# Altium PCB PCB1.PcbDoc
Units mil, origin at the board's own origin, x right, y up, seen from the top; angles counter-clockwise.
Board outline 3725 x 3985 mil, 2 copper layers (Top Layer, Bottom Layer); 36 components, 36 nets, 194 pads, 3 vias.
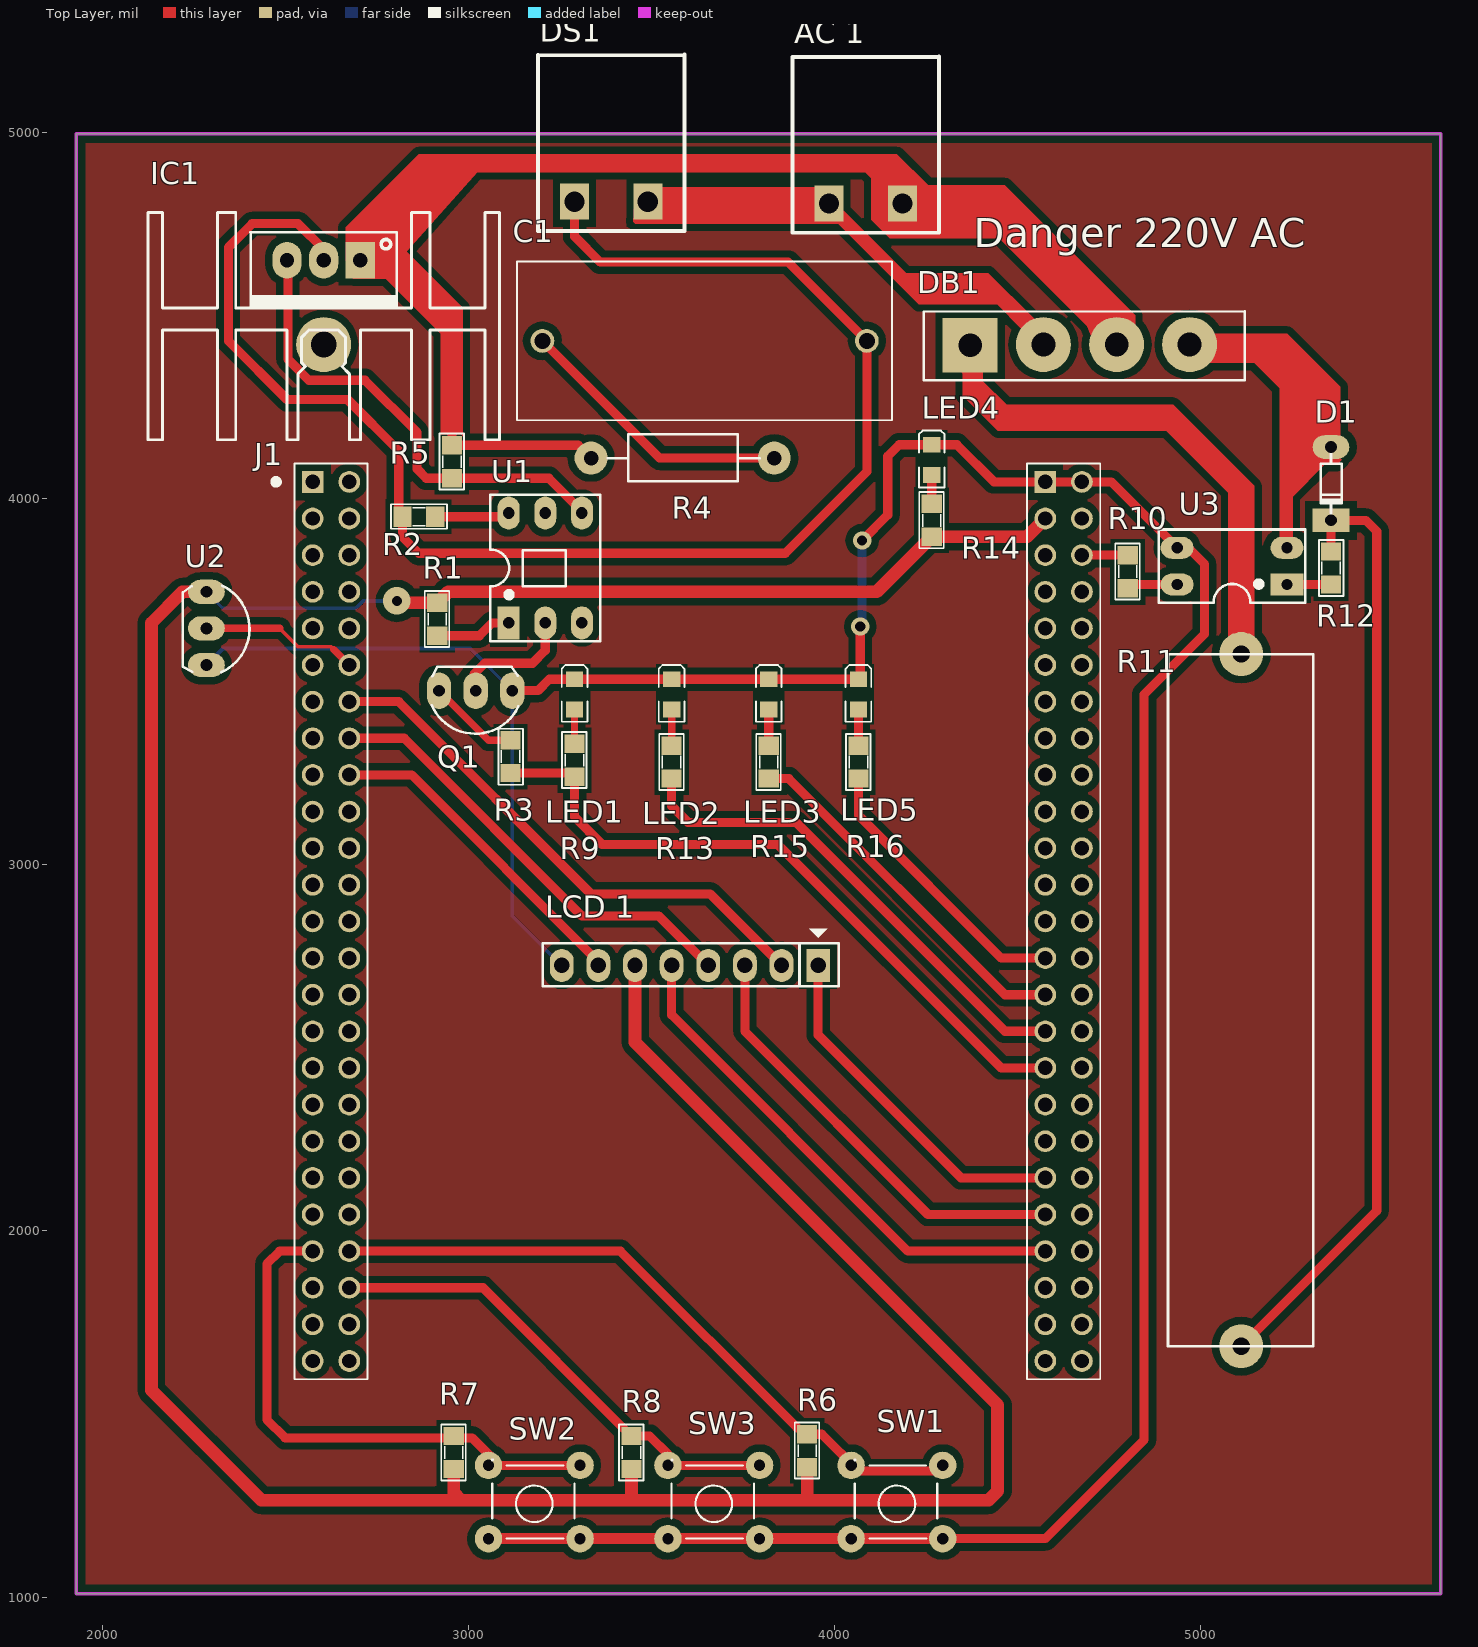
[diagram p0: Top Layer view]
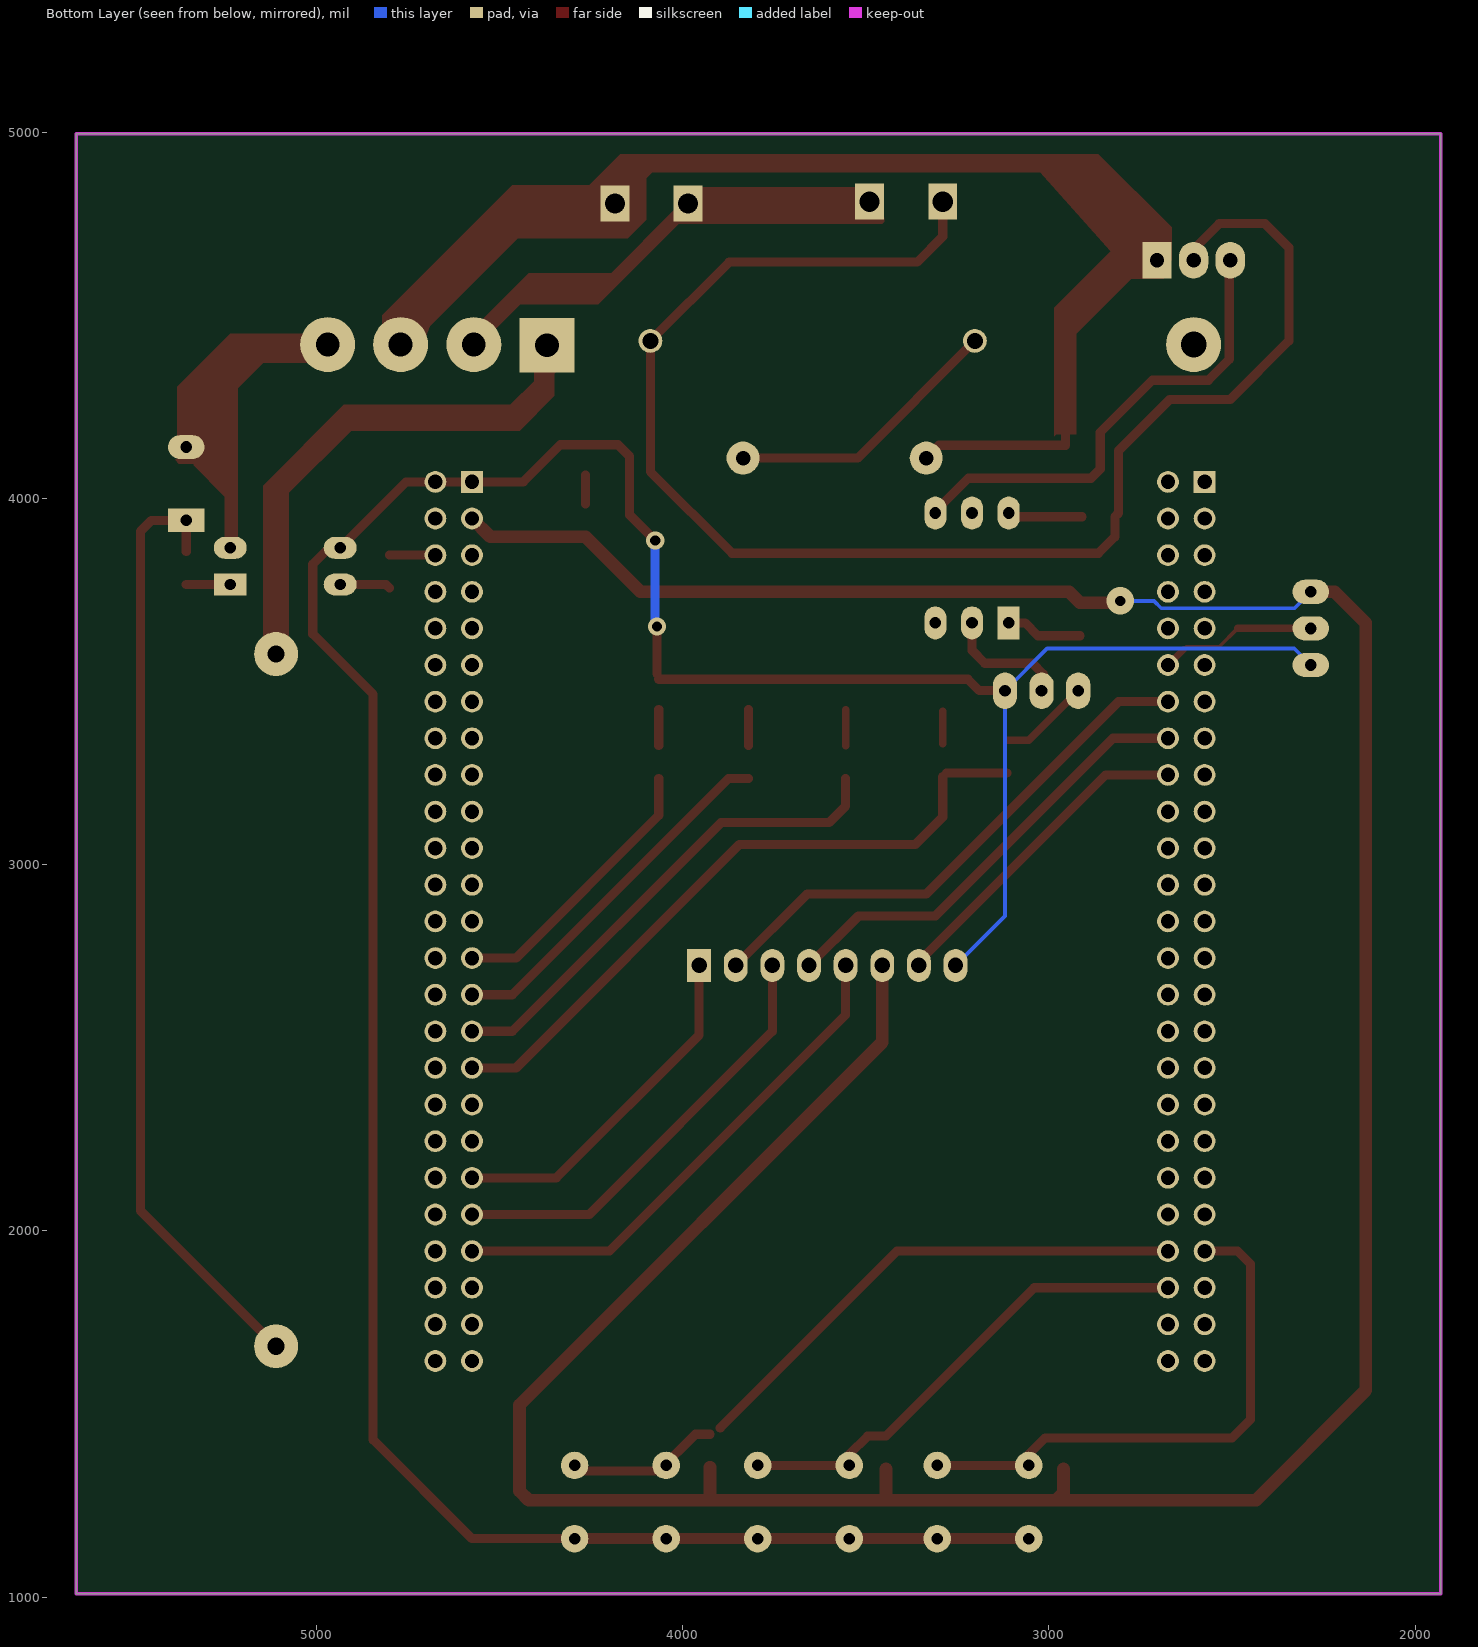
[diagram p1: Bottom Layer view, seen from below]

## Layer stack, top to bottom
Top Solder: solder mask 0.4, Solder Resist, Dk 3.5
Top Layer: signal copper 1.4
Dielectric 1: dielectric 12.6, FR-4, Dk 4.8
Bottom Layer: signal copper 1.4
Bottom Solder: solder mask 0.4, Solder Resist, Dk 3.5

## Board outline
1930,1010 1930,4995 5655,4995 5655,1010

## Design rules (kind name [scope] priority, off if disabled: settings)
Clearance [All] p1: gap=20 ignorepadtopadclearanceinfootprint=FALSE except(0: Arc-Hole Track-Hole SMDPad-Hole THPad-Hole Via-Hole Fill-Hole Poly-Hole Region-Hole Text-Hole; 10: Arc-Arc Arc-Track Arc-SMDPad Arc-THPad Arc-Via Track-Track Track-SMDPad Track-THPad Track-Via SMDPad-SMDPad SMDPad-THPad SMDPad-Via THPad-THPad THPad-Via Via-Via; 15: Arc-Text Track-Text SMDPad-Text THPad-Text Via-Text Fill-Text Poly-Text Region-Text Text-Text)
ComponentClearance [All] p1 off: gap=10 collisioncheckmode=3 verticalgap=10 showdistances=FALSE
Height [All] p1 off: minheight=0 maxheight=1000 prefheight=500
PolygonConnect [All] p1: connectstyle=Relief reliefconductorwidth=10 reliefentries=4 polygonreliefangle="90 Angle" airgapwidth=10
RoutingVias [All] p1: holewidth=28 width=50 viastyle="Through Hole" minholewidth=28 minwidth=50 maxholewidth=28 maxwidth=50
SolderMaskExpansion [All] p1: expansion=4
Width [All] p1: maxlimit=40 minlimit=10 preferedwidth=20 minimp=50.000000 maximp=50.000000 favimp=50.000000
28 further rules are at their usual default settings.

## Components (designator, comment, footprint, x,y, rotation, side; value= is the part's Value field where it differs from the comment)
"AC 1" "Header 2" "DOMINO 2-5mm -H" 3985,4805 r0 top
C1 "" C-SE-22,5x26x20x11x4 3645,4430 r180 top value=0.1uF/630
D1 "5V" DIO-0.5A-SMALL 5355,4040 r90 top
DB1 "Diode Brideg" "DIO-Bri 5A" 4370,4420 r0 top value="Cau 1A"
DS1 "Lamp" "DOMINO 2-5mm -H" 3290,4810 r0 top
IC1 "BT137" TO220H2 2605,4650 r180 top value=LM317
J1 "STM32F4DISCOVERY" STMICROELECTRONICS_STM32F4DISCOVERY_STM32F4DISCOVERY(Primary) 2575,4045 r0 top
"LCD 1" "Header 8" JP8 3955,2725 r180 top
LED1 "LED" LED_0805_Blue 3290,3465 r90 top value="LED 3 ly Single Colour"
LED2 "LED" LED_0805_Blue 3555,3465 r90 top value="LED 3 ly Single Colour"
LED3 "LED" LED_0805_Blue 3820,3465 r90 top value="LED 3 ly Single Colour"
LED4 "LED" LED_0805_Blue 4265,4105 r90 top value="LED 3 ly Single Colour"
LED5 "LED" LED_0805_Blue 4065,3465 r90 top value="LED 3 ly Single Colour"
Q1 "C1815" QTO-92 3020,3475 r180 top
R1 "220R" RES-SM-0805 2915,3715 r270 top value="R1/4W - 1K"
R2 "180R" RES-SM-0805 2910,3950 r180 top value="R1/4W - 1K"
R3 "2.2k" RES-SM-0805 3115,3250 r90 top value="R1/4W - 1K"
R4 "100R/2W" R1W 3335,4110 r0 top value="R1/4W - 1K"
R5 "150R" RES-SM-0805 2955,4145 r270 top value="R1/4W - 1K"
R6 "10K" RES-SM-0805 3925,1445 r270 top value="R1/4W - 1K"
R7 "10K" RES-SM-0805 2960,1440 r270 top value="R1/4W - 1K"
R8 "10K" RES-SM-0805 3445,1440 r270 top value="R1/4W - 1K"
R9 "330R" RES-SM-0805 3290,3330 r270 top value="R1/4W - 1K"
R10 "1K" RES-SM-0805 4800,3845 r270 top
R11 "10K 10W" PCBComponent_1 5110,3575 r270 top
R12 "470R" RES-SM-0805 5355,3765 r90 top
R13 "330R" RES-SM-0805 3555,3325 r270 top value="R1/4W - 1K"
R14 "1K" RES-SM-0805 4265,3985 r270 top value="R1/4W - 1K"
R15 "330R" RES-SM-0805 3820,3325 r270 top value="R1/4W - 1K"
R16 "330R" RES-SM-0805 4065,3325 r270 top value="R1/4W - 1K"
SW1 "SW" SW4 4295,1160 r180 top value="Button chip 4 pin"
SW2 "SW" SW4 3305,1160 r180 top value="Button chip 4 pin"
SW3 "SW" SW4 3795,1160 r180 top value="Button chip 4 pin"
U1 "MOC3021" DIP6/W0.3 3110,3660 r0 top
U2 "LM35" QTO-92 2285,3645 r270 top
U3 "PC817" DIP4 5235,3765 r90 top

## Footprints (in the part's own frame and the unit in brackets; to place one, negate y for a bottom-side part, rotate by r counter-clockwise, add the part's x,y. Pads: shape width x height; smd on the part's side, far side on the other; paste and mask are expansions set on the pad)
C-SE-22,5x26x20x11x4 [mm] "Film Capacitors, 2-Leads, Body 22,5x26x20x11"
  round 1.65 hole 1.1: 1(-11.25,0) 2(11.25,0)
  silkscreen extent -13,-5.5 13,5.5, body extent -13,-5.5 13,5.5, height 20.01
DIO-0.5A-SMALL [mil] "Diode muoi, W 80mil, L 300mil"
  oval 65x100 hole 32: 1(100,0)
  rect 65x100 hole 32: 2(-100,0)
  silkscreen extent -80,-30 80,28, body extent -108,-33 108,32, height 61
"DIO-Bri 5A" [mil] "Brigde 5A"
  rect 150x150 hole 65: 1(0,-2)
  round 150 hole 65: 2(200,0) 3(400,0) 4(599,0)
  silkscreen extent -127,-97 750,90, body extent -129,-90 749,58, height 937
DIP4 [mil]
  rect 60x90 hole 31: 1(0,0)
  oval 60x90 hole 31: 2(100,0) 3(100,300) 4(0,300)
  silkscreen extent -50,-50 150,350, body extent -59,-10 159,305, height 170
DIP6/W0.3 [mil] "6 PIN, W 300mil, Pin to pin 100mil"
  rect 60x90 hole 31.5: 1(0,0)
  oval 60x90 hole 31.5: 2(100,0) 3(200,0) 4(200,300) 5(100,300) 6(0,300)
  silkscreen extent -50,-50 250,350, body extent -58,-7 260,307, height 170
"DOMINO 2-5mm -H" [mm]
  rect 2x2.5 hole 1.4: 1(0,0) 2(5.08,0)
  silkscreen extent -2.54,-2.03 7.62,10.21, body extent -2.5,-1.75 7.58,10.25, height 3.15
JP8 [mil] "JP8"
  rect 65x90 hole 42: 1(0,0)
  oval 65x90 hole 42: 2(100,0) 3(200,0) 4(300,0) 5(400,0) 6(500,0) 7(600,0) 8(700,0)
  silkscreen extent -56,-100 752,57, body extent -48,-50 748,48, height 323
LED_0805_Blue [mm] "Chip LED, 2-Leads, Body 2.0x1.3mm, IPC Medium Density"
  rect 1.1x1.2 smd: 1(-1.05,0) 2(1.05,0)
  silkscreen extent -1.91,-0.89 2.03,0.89, body extent -1,-0.63 1,0.62, height 0.68
PCBComponent_1 [mil] "R5W , 2 pin, 400 x 950mil"
  round 120 hole 47.24: 1(0,0) 2(1889.76,0)
  silkscreen extent 0,-200 1890,197
QTO-92 [mil] "TO-92"
  oval 66x100 hole 32: 1(-100,0) 2(0,0) 3(100,0)
  silkscreen extent -117,-65 120,118, body extent -109,-66 109,95, height 245
R1W [mil] "R 1W, 2 pin, 500mil"
  round 90 hole 39.37: 1(0,0) 2(500,0)
  silkscreen extent 46,-63 460,65
RES-SM-0805 [mil]
  rect 50x55 smd: 1(0,0) 2(90,0)
  silkscreen extent -32,-34 121,33, body extent 6,-25 84,25, height 31
STMICROELECTRONICS_STM32F4DISCOVERY_STM32F4DISCOVERY(Primary) [mm]
  rect 1.508x1.508 hole 1: P1(0,0) P51(50.8,0)
  round 1.508 hole 1: P2(2.54,0) P3(0,-2.54) P4(2.54,-2.54) P5(0,-5.08) P6(2.54,-5.08) P7(0,-7.62) P8(2.54,-7.62) P9(0,-10.16) P10(2.54,-10.16) P11(0,-12.7) P12(2.54,-12.7) P13(0,-15.24) P14(2.54,-15.24) P15(0,-17.78) P16(2.54,-17.78) P17(0,-20.32) P18(2.54,-20.32) P19(0,-22.86) P20(2.54,-22.86) P21(0,-25.4) P22(2.54,-25.4) P23(0,-27.94) P24(2.54,-27.94) P25(0,-30.48) P26(2.54,-30.48) P27(0,-33.02) P28(2.54,-33.02) P29(0,-35.56) P30(2.54,-35.56) P31(0,-38.1) P32(2.54,-38.1) P33(0,-40.64) P34(2.54,-40.64) P35(0,-43.18) P36(2.54,-43.18) P37(0,-45.72) P38(2.54,-45.72) P39(0,-48.26) P40(2.54,-48.26) P41(0,-50.8) P42(2.54,-50.8) P43(0,-53.34) P44(2.54,-53.34) P45(0,-55.88) P46(2.54,-55.88) P47(0,-58.42) P48(2.54,-58.42) P49(0,-60.96) P50(2.54,-60.96) P52(53.34,0) P53(50.8,-2.54) P54(53.34,-2.54) P55(50.8,-5.08) P56(53.34,-5.08) P57(50.8,-7.62) P58(53.34,-7.62) P59(50.8,-10.16) P60(53.34,-10.16) P61(50.8,-12.7) P62(53.34,-12.7) P63(50.8,-15.24) P64(53.34,-15.24) P65(50.8,-17.78) P66(53.34,-17.78) P67(50.8,-20.32) P68(53.34,-20.32) P69(50.8,-22.86) P70(53.34,-22.86) P71(50.8,-25.4) P72(53.34,-25.4) P73(50.8,-27.94) P74(53.34,-27.94) P75(50.8,-30.48) P76(53.34,-30.48) P77(50.8,-33.02) P78(53.34,-33.02) P79(50.8,-35.56) P80(53.34,-35.56) P81(50.8,-38.1) P82(53.34,-38.1) P83(50.8,-40.64) P84(53.34,-40.64) P85(50.8,-43.18) P86(53.34,-43.18) P87(50.8,-45.72) P88(53.34,-45.72) P89(50.8,-48.26) P90(53.34,-48.26) P91(50.8,-50.8) P92(53.34,-50.8) P93(50.8,-53.34) P94(53.34,-53.34) P95(50.8,-55.88) P96(53.34,-55.88) P97(50.8,-58.42) P98(53.34,-58.42) P99(50.8,-60.96) P100(53.34,-60.96)
  silkscreen extent -2.74,-62.23 54.61,1.27
SW4 [mil] "SW button 4pin, 250 x250 mil"
  round 75 hole 31: 1(0,0) 2(250,-200) 3(250,0) 4(0,-200)
  silkscreen extent 15,-215 240,0, body extent -36,-220 276,24, height 276
TO220H2 [mil] "TO-220 - 1-2-3"
  round 150 hole 70: 0(0,230)
  rect 80x100 hole 39: 1(-100,0)
  oval 80x100 hole 39: 2(0,0) 3(100,0)
  silkscreen extent -480,-130 480,490, body extent -449,-177 453,469, height 1206

## Part data
"AC 1": "Header, 2-Pin", Manufacturer="Generic Components", Class=Connector
C1: library part "Cap Pol3", "Polarized Capacitor (Surface Mount)", LatestRevisionDate=17-Jul-2002, LatestRevisionNote="Re-released for DXP Platform.", PackageReference=C0805, Publisher="Altium Limited"
D1: library part "DIODE Zener", "Zenner"
DB1: library part "DIODE BRIGDE", "Convert AC to DC voltage, 4 pin", ="Cau 5A"
DS1: "Incandescent Bulb", LatestRevisionDate=17-Jul-2002, LatestRevisionNote="Re-released for DXP Platform.", PackageReference=PIN2, Published=24-Mar-1999, Publisher="Altium Limited"
IC1: "Triacs - 8A"
J1: "Development kit: ARM ST; pin strips, pin header; No.of", Package=None, Availability=Unavailable, MF=STMicroelectronics, MP=STM32F4DISCOVERY, Price=None, SnapEDA_Link=https://www.snapeda.com/symbols-footprints/STM32F4DISCOVERY/STMicroelectronics/view-part/?ref=snap
"LCD 1": library part HED8V, "Header 8 Vit Broad"
LED1 LED2 LED3 LED4 LED5: "LED Single colour Green and Red"
Q1: "NPN 600mW, ECB", =C2383
R1 R2 R3 R4 R5 R6 R7 R8 R9 R13 R14 R15 R16: library part R, "Resistor 1/4W"
R10 R12: library part Res, "Res", Manufacturer="Generic Components", Class=Passive, Published=08/06/2000, Publisher="Altium Hobart Technology Centre", SubClass=R
R11: library part "Res 10 W", "10W Res Power", Creator="Nguyen Ba Bien"
SW1 SW2 SW3: library part SW4, "Switch button 4 pin"
U1 U3: "Single Opto"
U2: "Teminal"

## Via types
v1: diameter 50, hole 28, Top Layer to Bottom Layer, 2 vias
v2: diameter 75, hole 28, Top Layer to Bottom Layer, 1 vias

## Nets (pads, with @x,y where several pads share a name; then routed paths per layer and width w, separated by ;. In a path a pad name is that pad's centre, name@x,y a point inside that pad or via, vN(x,y) a via of type N, cw(c..) or ccw(c..) an arc to the next point about the centre after c; other vN are vias at no path point)
AC+: "AC 1.1" DB1.2 DS1.2 | length 1234.5
  Top Layer w25: DS1.2 3980,4810 ; 3985,4805 4200,4590 4400,4590 DB1.2
AC-: "AC 1.2" DB1.3 IC1.1 R4.1 R5.1 | length 3517.6
  Top Layer w25: R4.1 3300,4145 R5.1 2955,4495 2800,4650 IC1.1 2705,4725 2895,4915 4075,4915 4185,4805 4445,4805 4770,4480 DB1.3
GND: "LCD 1.8" J1.P51 J1.P52 LED1.2 LED2.2 LED3.2 LED4.2 LED5.2 Q1.1 SW1.1 SW1.3 SW2.1 SW2.3 SW3.1 SW3.3 U2.3 U3.3 | length 8656.2
  Top Layer w25: Q1.1 3190,3475 3221.34,3506.34 LED1.2 LED2.2 LED3.2 LED5.2 ; LED5.2@4070,3521.34 v1(4070,3650) ; v1(4075,3885) 4145,3955 4145,4115 4176.34,4146.34 LED4.2 4333.66,4146.34 4435,4045 J1.P51 J1.P52 4755,4045 U3.3 4965,3865 5010,3820 5010,3630 4845,3465 4845,1430 4575,1160 SW1.1
  Top Layer w30: SW2.3 SW2.1 SW3.3 SW3.1 SW1.3 SW1.1@4285,1160
  Bottom Layer w10: U2.3 2330,3590 3005,3590 Q1.1 3120,2860 3255,2725
  Bottom Layer w25: v1(4070,3650) 4075,3650 v1(4075,3885)
NetC1_1: C1.1 DS1.1 IC1.2 R2.2 | length 4176.3
  Top Layer w0: IC1.2 IC1.2@2605,4680
  Top Layer w25: IC1.2@2605,4680 2535,4750 2410,4750 2345,4685 2345,4430 2505,4270 2670,4270 2810,4130 2810,3960 R2.2 2820,3895 2865,3850 3865,3850 4087.91,4072.91 C1.1 3872.91,4645 3360,4645 3290,4715 DS1.1
NetC1_2: C1.2 R4.2 | length 765.5
  Top Layer w25: C1.2 3522.09,4110 R4.2
NetD1_1: D1.1 DB1.4 U3.2 | length 879.4
  Top Layer w25: DB1.4 5165,4420 5355,4230 D1.1 5235,4020 U3.2
NetD1_2: D1.2 R11.2 R12.2 | length 2600.4
  Top Layer w25: R11.2 5480,2055.24 5480,3910 5450,3940 D1.2 R12.2
NetDB1_1: DB1.1 R11.1 | length 1421.9
  Top Layer w25: DB1.1 4370,4310 4455,4225 4920,4225 5110,4035 R11.1
NetIC1_3: IC1.3 R5.2 U1.4 | length 1309.2
  Top Layer w25: IC1.3 2507.5,4647.5 2507.5,4379.61 2564.61,4322.5 2717.5,4322.5 2860,4180 2860,4080 2885,4055 R5.2 3220,4055 3310,3965 U1.4
NetJ1_P12: J1.P12 U2.2 | length 431.4
  Top Layer w10: 2485,3645 2535,3595 2625,3595 2632.5,3587.5
  Top Layer w20: U2.2 2485,3645 ; 2632.5,3587.5 J1.P12
NetJ1_P14: "LCD 1.2" J1.P14 | length 1478.2
  Top Layer w25: J1.P14 2810,3445 3335,2920 3660,2920 3855,2725
NetJ1_P16: "LCD 1.4" J1.P16 | length 1236.8
  Top Layer w25: J1.P16 2825,3345 3310,2860 3520,2860 3655,2725
NetJ1_P18: "LCD 1.7" J1.P18 | length 901.2
  Top Layer w25: J1.P18 2845,3245 3355,2735 3355,2725
NetJ1_P43: J1.P43 R7.1 SW2.2 SW2.4 | length 1471.3
  Top Layer w25: J1.P43 2485,1945 2450,1910 2450,1485 2500,1435 3010,1435 3085,1360 SW2.4
NetJ1_P44: J1.P44 R6.1 SW1.2 SW1.4 | length 1838.8
  Top Layer w25: J1.P44 3415,1945 R6.1@3897.5,1462.5 ; R6.1 3965,1445 4065,1345 SW1.4@4300,1345
NetJ1_P46: J1.P46 R8.1 SW3.2 SW3.4 | length 1338.5
  Top Layer w25: J1.P46 3040,1845 R8.1 3495,1440 3545,1390 SW3.2 SW3.4
NetJ1_P77: J1.P77 R16.2 | length 771.5
  Top Layer w25: R16.2 4065,3135 4455,2745 J1.P77
NetJ1_P79: J1.P79 R15.2 | length 999.4
  Top Layer w25: R15.2 3875,3235 4465,2645 J1.P79
NetJ1_P81: J1.P81 R13.2 | length 1349.7
  Top Layer w25: R13.2 3555,3160 3600,3115 3895,3115 4465,2545 J1.P81
NetJ1_P83: J1.P83 R3.1 R9.2 | length 1843.7
  Top Layer w25: R3.1 R9.2@3280,3250 ; R9.2 3290,3130 3365,3055 3845,3055 4455,2445 J1.P83
NetJ1_P89: "LCD 1.1" J1.P89 | length 971.5
  Top Layer w25: 3955,2725 3955,2535 4345,2145 J1.P89
NetJ1_P91: "LCD 1.3" J1.P91 | length 1207.1
  Top Layer w25: 3755,2725 3755,2545 4255,2045 J1.P91
NetJ1_P93: "LCD 1.5" J1.P93 | length 1422.2
  Top Layer w25: 3555,2725 3555,2590 4200,1945 J1.P93
NetLED1_1: LED1.1 R9.1 | length 88.7
  Top Layer w20: R9.1 LED1.1@3290,3418.66
NetLED2_1: LED2.1 R13.1 | length 98.7
  Top Layer w20: R13.1 LED2.1
NetLED3_1: LED3.1 R15.1 | length 98.7
  Top Layer w25: R15.1 LED3.1
NetLED4_1: LED4.1 R14.1 | length 78.7
  Top Layer w25: R14.1 LED4.1
NetLED5_1: LED5.1 R16.1 | length 98.7
  Top Layer w25: R16.1 LED5.1
NetQ1_2: Q1.2 U1.2 | length 351.9
  Top Layer w25: Q1.2@3015,3465 3015,3520 3045,3550 3175,3550 3210,3585 U1.2
NetQ1_3: Q1.3 R3.2 | length 250.9
  Top Layer w20: Q1.3 3055,3340 R3.2
NetR1_2: R1.2 U1.1 | length 209.5
  Top Layer w25: R1.2 3030,3625 3065,3660 U1.1
NetR2_1: R2.1 U1.6 | length 204.1
  Top Layer w25: R2.1 3100,3950 U1.6
NetR10_2: R10.2 U3.4 | length 139.1
  Top Layer w25: R10.2 4810,3765 U3.4
NetR12_1: R12.1 U3.1 | length 120
  Top Layer w25: U3.1 R12.1
VCC: "LCD 1.6" J1.P53 R1.1 R6.2 R7.2 R8.2 R14.2 U2.1 | length 9247.2
  Top Layer w35: U2.1 2220,3745 2135,3660 2135,1565 2435,1265 2980,1265 ; v2@2810,3715 R1.1 2945,3745 4115,3745 R14.2 4525,3895 J1.P53 ; R7.2 2960,1285 2980,1265 ; R8.2 3445,1270 3440,1265 ; 3455,2725 3455,2515 4445,1525 4445,1290 4420,1265 3925,1265 ; R6.2 3925,1265 ; 2980,1265 3440,1265 ; 3440,1265 3925,1265
  Bottom Layer w10: U2.1 2329.69,3700.31 2693.51,3700.31 2713.19,3720 v2(2805,3720)
VCC3V: J1.P56 R10.1 | length 125
  Top Layer w25: J1.P56 R10.1
pads on no net: IC1.0 J1.P1 J1.P2 J1.P3 J1.P4 J1.P5 J1.P6 J1.P7 J1.P8 J1.P9 J1.P10 J1.P11 J1.P13 J1.P15 J1.P17 J1.P19 J1.P20 J1.P21 J1.P22 J1.P23 J1.P24 J1.P25 J1.P26 J1.P27 J1.P28 J1.P29 J1.P30 J1.P31 J1.P32 J1.P33 J1.P34 J1.P35 J1.P36 J1.P37 J1.P38 J1.P39 J1.P40 J1.P41 J1.P42 J1.P45 J1.P47 J1.P48 J1.P49 J1.P50 J1.P54 J1.P55 J1.P57 J1.P58 J1.P59 J1.P60 J1.P61 J1.P62 J1.P63 J1.P64 J1.P65 J1.P66 J1.P67 J1.P68 J1.P69 J1.P70 J1.P71 J1.P72 J1.P73 J1.P74 J1.P75 J1.P76 J1.P78 J1.P80 J1.P82 J1.P84 J1.P85 J1.P86 J1.P87 J1.P88 J1.P90 J1.P92 J1.P94 J1.P95 J1.P96 J1.P97 J1.P98 J1.P99 J1.P100 U1.3 U1.5

## Polygon pours and split planes (outlines as drawn)
no net on Top Layer (solid, pour order 2): 1930,4995 5655,4995 5655,1010 1930,1010

## Keep-outs
Keep-Out Layer:
  lines w10: 1930,1010 1930,4995 5655,4995 5655,1010 5495,1010 1930,1010

## Other copper
Top Layer:
  region net NetD1_1: 4960,4450 5235,4450 5380,4305 5380,4110 5385,4105 5375,4095 5335,4095 5335,4090 5250,4005 5250,3875 5245,3880 5215,3880 5215,4300 5145,4370 4995,4370
  region net NetDB1_1: 4345,4345 4350,4340 4350,4280 4445,4185 4905,4185 5075,4015 5075,3590 5080,3585 5085,3590 5145,3590 5145,4035 4925,4255 4470,4255 4405,4320 4405,4345
  region net AC+: 3455,4850 4020,4850 4020,4790 4195,4615 4420,4615 4545,4490 4545,4470 4525,4450 4445,4530 4230,4530 4010,4750 3455,4750 3450,4755
  region net AC-: 2685,4600 2775,4600 2925,4450 2925,4175 2980,4175 2985,4170 2985,4520 2805,4700
  region: 4645,5155
  region net AC-: 2665,4650 2665,4740 2865,4940 4170,4940 4255,4855 4465,4855 4820,4500 4820,4395 4775,4350 4712.5,4412.5 4690,4470 4450,4710 4150,4710 4100,4760 4100,4890 3023.91,4890 2810,4650

## Silkscreen, mask and mechanical layers (free items; w line width, h text height)
Top Overlay:
  text "Danger 220V AC" at 4380,4685 h80